# Altium PCB USB2JTAG.PcbDoc
Units mm, origin at the board's own origin, x right, y up, seen from the top; angles counter-clockwise.
Board outline 30 x 14.5 mm, 2 copper layers (Top Layer, Bottom Layer); 28 components, 24 nets, 132 pads, 101 vias.
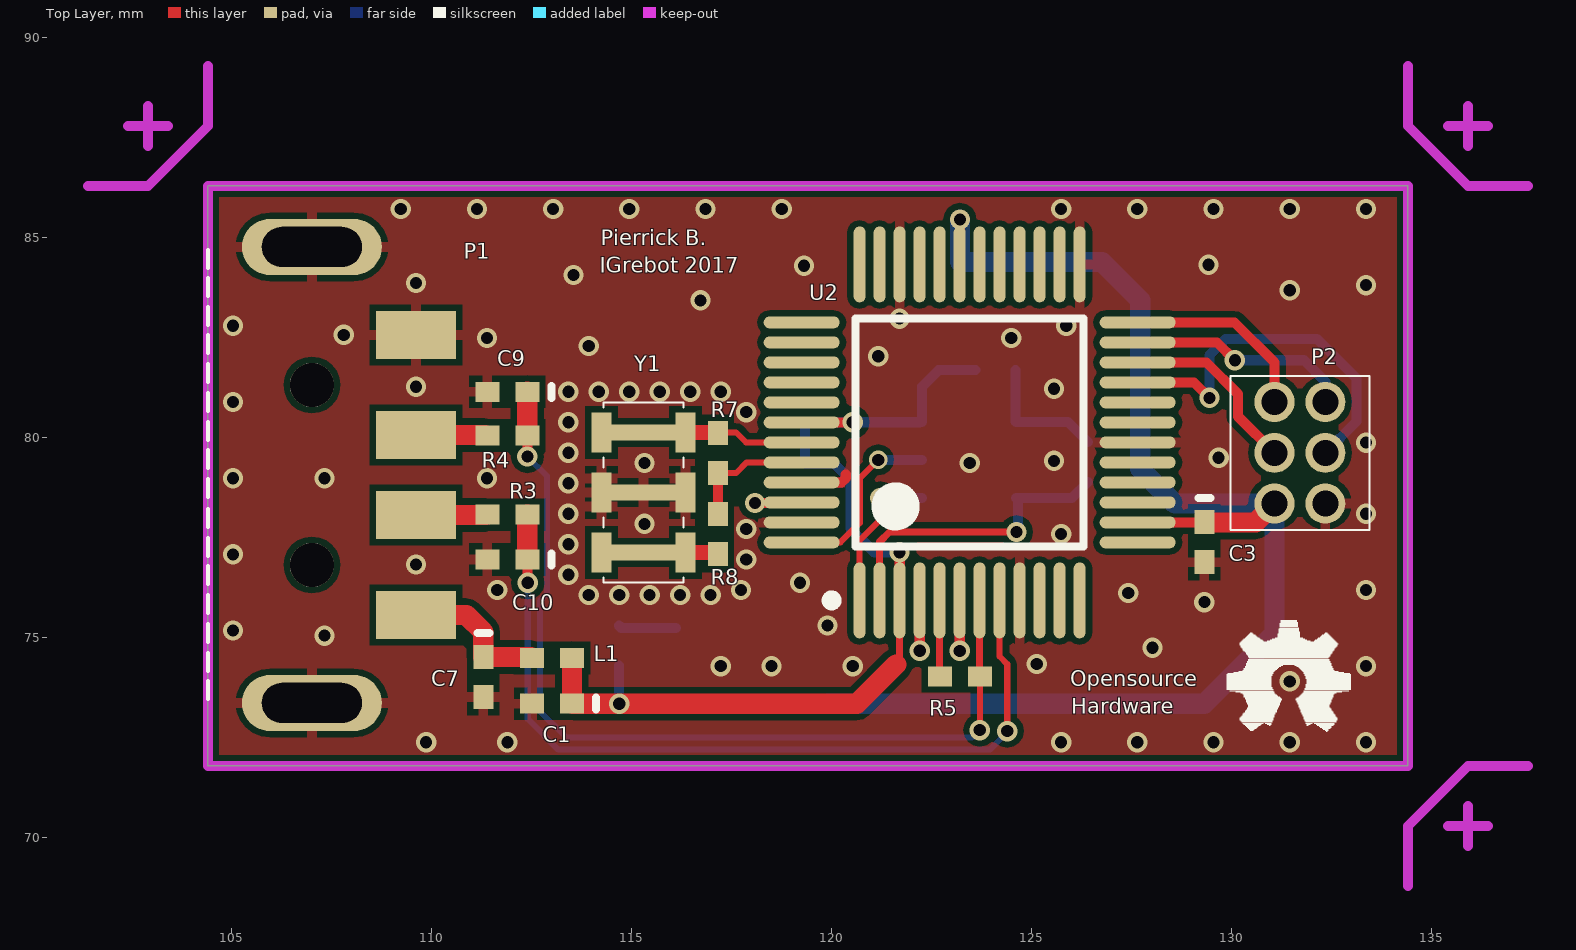
[diagram p0: Top Layer view]
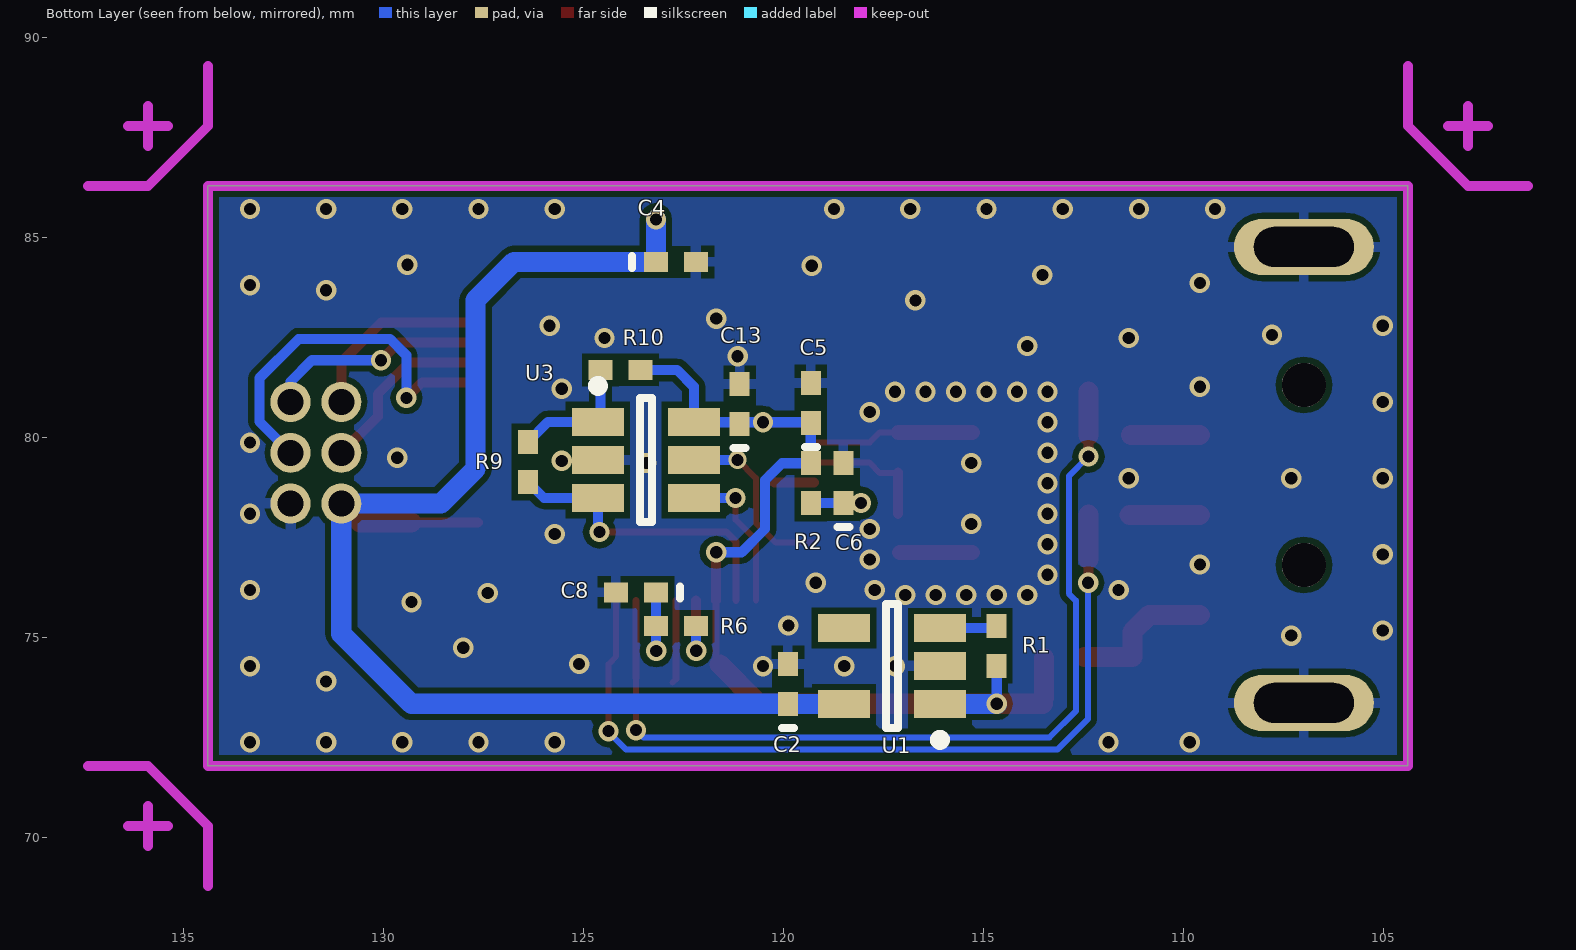
[diagram p1: Bottom Layer view, seen from below]

## Layer stack, top to bottom
Top Layer: signal copper 0.0356
Dielectric: dielectric 0.32, FR-4, Dk 4.8
Bottom Layer: signal copper 0.0356

## Board outline
104.4,71.8 134.4,71.8 134.4,86.3 104.4,86.3

## Design rules (kind name [scope] priority, off if disabled: settings)
Clearance [All] p1: gap=0.152
HoleSize [All] p1: absolutevalues=TRUE maxlimit=2.54 minlimit=0.3 maxpercent=80.000 minpercent=20.000
PlaneClearance [All] p1: clearance=0.305
PlaneConnect PlaneConnect_via [InNet('GND') And IsVia] p1: planeconnectstyle=Direct reliefexpansion=0.508 reliefentries=4 reliefconductorwidth=0.254 reliefairgap=0.254
PlaneConnect [All] p2: planeconnectstyle=Relief reliefexpansion=0.508 reliefentries=4 reliefconductorwidth=0.254 reliefairgap=0.254
PolygonConnect PolygonConnect_via [IsVia vs InNet('GND')] p1: connectstyle=Direct reliefconductorwidth=0.254 reliefentries=4 polygonreliefangle="90 Angle"
PolygonConnect [All] p2: connectstyle=Relief reliefconductorwidth=0.254 reliefentries=4 polygonreliefangle="90 Angle"
RoutingVias [All] p1: holewidth=0.305 width=0.508 viastyle="Through Hole" minholewidth=0.305 minwidth=0.508 maxholewidth=0.711 maxwidth=1.27
SilkscreenOverComponentPads [All] p1: minsilkscreentomaskgap=0.254
SolderMaskExpansion [All] p1: expansion=0.102
Width [All] p1: maxlimit=0.762 minlimit=0.152 preferedwidth=0.254
24 further rules are at their usual default settings.

## Components (designator, comment, footprint, x,y, rotation, side; value= is the part's Value field where it differs from the comment)
C1 "Cap" C0402 113.005,73.355 r180 top
C2 "Cap" C0402 119.9,73.851 r90 bottom
C3 "Cap" C0402 129.311,77.394 r270 top
C4 "Cap" C0402 122.7,84.4 r180 bottom
C5 "Cap" C0402 119.329,80.874 r90 bottom
C6 "Cap" C0402 118.513,78.875 r90 bottom
C7 "Cap" C0402 111.287,74.022 r270 top
C8 "Cap" C0402 123.7,76.141 r0 bottom
C9 "Cap" C0402 111.887,81.153 r180 top
C10 "Cap" C0402 111.887,76.962 r180 top
C13 "Cap" C0402 121.107,80.848 r90 bottom
L1 "ferrite bead" 0402 113,74.5 r0 top
P1 "Usb port" 480371000 109.601,76.073 r270 top
P2 "Header 3X2" minitek127-6way 131.064,80.899 r270 top
R1 "Res2" 0402 114.681,74.803 r270 bottom
R2 "Res2" 0402 119.329,78.867 r270 bottom
R3 "Res2" 0402 111.887,78.08 r0 top
R4 "Res2" 0402 111.887,80.061 r0 top
R5 "Res2" 0402 123.2,74.04 r0 top
R6 "Res2" 0402 122.7,75.292 r180 bottom
R7 "Res2" 0402 117.148,79.629 r90 top
R8 "Res2" 0402 117.148,77.597 r90 top
R9 "Res2" 0402 126.4,79.4 r270 bottom
R10 "Res2" 0402 124.086,81.7 r0 bottom
U1 "MIC5504-3.3YM5" SOT23-5_M 117.3,74.3 r0 bottom
U2 "FT2232D" LQFP-48 123.444,80.137 r90 top
U3 "93AA46BT" SOT23-6_M 123.451,79.449 r180 bottom
Y1 "PBRC6.00MR50X000" PBRC_M 115.289,80.137 r270 top

## Footprints (in the part's own frame and the unit in brackets; to place one, negate y for a bottom-side part, rotate by r counter-clockwise, add the part's x,y. Pads: shape width x height; smd on the part's side, far side on the other; paste and mask are expansions set on the pad)
0402 [mm] "Chip Capacitor, Body 1.0x0.5mm, IPC High Density"
  rect 0.6x0.5 smd: 1(-0.5,0) 2(0.5,0)
  body extent -0.5,-0.25 0.5,0.25, height 0.3
480371000 [mm] "Universal Serial Bus (USB) Shielded I/O Plug, Type A, Right Angle, Surface Mount, 0.76µm Gold (Au) Plating, PCB Thickness 1.20mm-1.60mm, Tray Package, Lead-Free"
  round 1.1 hole 1.1 unplated: 0(-5.25,-2.6) 0(-0.75,-2.6)
  rect 1.2x2 smd: 1(0.5,0) 2(-2,0) 3(-4,0) 4(-6.5,0)
  oval 1.4x3.5 hole 1 slot 2.5 at 90 deg: Harness(-8.7,-2.6) Harness(2.7,-2.6)
  silkscreen extent -8.63,-5.2 2.6,-5.2, body extent -9.35,-20.38 3.35,0.9, height 3.05
C0402 [mm] "Chip Inductor, Body 1.0x0.5mm, IPC High Density"
  rect 0.6x0.5 smd: 1(-0.5,0) 2(0.5,0)
  silkscreen extent -1.1,-0.15 -1.1,0.15, body extent -0.5,-0.3 0.5,0.3, height 0.2
LQFP-48 [mm] "TSQFP, 48-Leads, Body 9,0x9,0mm (max), Pitch 0,50mm, IPC Medium Density"
  oval 1.9x0.3 smd: 1(-4.2,2.75) 2(-4.2,2.25) 3(-4.2,1.75) 4(-4.2,1.25) 5(-4.2,0.75) 6(-4.2,0.25) 7(-4.2,-0.25) 8(-4.2,-0.75) 9(-4.2,-1.25) 10(-4.2,-1.75) 11(-4.2,-2.25) 12(-4.2,-2.75) 25(4.2,-2.75) 26(4.2,-2.25) 27(4.2,-1.75) 28(4.2,-1.25) 29(4.2,-0.75) 30(4.2,-0.25) 31(4.2,0.25) 32(4.2,0.75) 33(4.2,1.25) 34(4.2,1.75) 35(4.2,2.25) 36(4.2,2.75)
  oval 0.3x1.9 smd: 13(-2.75,-4.2) 14(-2.25,-4.2) 15(-1.75,-4.2) 16(-1.25,-4.2) 17(-0.75,-4.2) 18(-0.25,-4.2) 19(0.25,-4.2) 20(0.75,-4.2) 21(1.25,-4.2) 22(1.75,-4.2) 23(2.25,-4.2) 24(2.75,-4.2) 37(2.75,4.2) 38(2.25,4.2) 39(1.75,4.2) 40(1.25,4.2) 41(0.75,4.2) 42(0.25,4.2) 43(-0.25,4.2) 44(-0.75,4.2) 45(-1.25,4.2) 46(-1.75,4.2) 47(-2.25,4.2) 48(-2.75,4.2)
  silkscreen extent -4.32,-2.85 2.85,3.57, body extent -4.5,-4.5 4.5,4.5, height 1.5
minitek127-6way [mm]
  round 1 hole 0.65 paste-0.05 mask+0.05: 1(0,0) 2(0,1.27) 3(1.27,0) 4(1.27,1.27) 5(2.54,0) 6(2.54,1.27)
  silkscreen extent -0.65,-1.1 3.2,2.37, body extent -0.63,-1.05 3.17,2.35, height 5.5
PBRC_M [mm]
  rect 0.3x0.5 smd paste-0.05 mask+0.1: 1(-0.35,1.05) 1(-0.35,-1.05) 1(0.35,1.05) 1(0.35,-1.05) 2(1.15,1.05) 2(1.15,-1.05) 2(1.85,1.05) 2(1.85,-1.05) 3(2.65,1.05) 3(2.65,-1.05) 3(3.35,-1.05) 3(3.35,1.05)
  rect 0.4x2.6 smd: 1(0,0) 2(1.5,0) 3(3,0)
  silkscreen extent -0.75,-1 3.75,1, body extent -0.75,-1 3.75,1, height 1.15
SOT23-5_M [mm] "SOT23, 5-Leads, Body 2.9x1.6mm, Pitch 0.95mm, Lead Span 2.7mm, IPC Low Density"
  rect 1.3x0.7 smd: 1(-1.2,0.95) 2(-1.2,0) 3(-1.2,-0.95) 4(1.2,-0.95) 5(1.2,0.95)
  silkscreen extent -1.32,-1.55 0.15,1.97, body extent -1.25,-1.5 1.25,1.5, height 1.05
SOT23-6_M [mm] "SOT23, 6-Leads, Body 2.9x1.6mm, Pitch 0.95mm, Lead Span 2.7mm, IPC Low Density"
  rect 1.3x0.7 smd: 1(-1.2,0.95) 2(-1.2,0) 3(-1.2,-0.95) 4(1.2,-0.95) 5(1.2,0) 6(1.2,0.95)
  silkscreen extent -1.33,-1.55 0.15,1.97, body extent -1.47,-1.52 1.53,1.48, height 1.3

## Part data
C1 C2 C3 C4 C5 C6 C7 C8 C9 C10 C13: "Capacitor"
P2: "Header, 6-Pin, Dual row"
R1 R2 R3 R4 R5 R6 R7 R8 R9 R10: "Resistor"
Y1: library part PBRC12.00HR50X0RZ

## Via types
v1: diameter 0.508, hole 0.305, Top Layer to Bottom Layer, tented both sides, 98 vias
v2: diameter 0.508, hole 0.305, Top Layer to Bottom Layer, 2 vias
v3: diameter 0.457, hole 0.305, Top Layer to Bottom Layer, tented both sides, 1 vias

## Nets (pads, with @x,y where several pads share a name; then routed paths per layer and width w, separated by ;. In a path a pad name is that pad's centre, name@x,y a point inside that pad or via, vN(x,y) a via of type N, cw(c..) or ccw(c..) an arc to the next point about the centre after c; other vN are vias at no path point)
3V3: C2.1 C3.1 C4.1 P2.5 U1.5 U2.14 U2.31 | length 35.2
  Top Layer w0.254: U2.31 123.2,84.343 v1(123.2,85.461) ; U2.14 129.289,77.887 C3.1@129.311,77.91
  Top Layer w0.508: C3.1@129.311,77.887 130.592,77.887 P2.5
  Bottom Layer w0.254: C2.1@119.85,73.35 C2.1@119.9,73.3 ; C2.1 C2.1@119.904,73.355
  Bottom Layer w0.508: U1.5 C2.1@119.85,73.35 ; C2.1@119.904,73.355 129.311,73.355 131.064,75.108 P2.5 128.575,78.359 127.711,79.223 127.711,83.439 126.75,84.4 C4.1 v1@123.2,85.451
5V_USB: C1.1 C5.1 C13.1 L1.2 R1.2 R2.1 R10.1 U1.1 U2.3 U2.42 U3.6 | length 27.7
  Top Layer w0.178: v1(121.691,77.14) v1@121.694,77.137 ; 121.694,74.425 U2.3
  Top Layer w0.254: U2.42 v2@120.523,80.387 ; 120.625,73.355 121.694,74.425 ; U2.3 v1@121.694,77.137
  Top Layer w0.508: C1.1@113.5,73.5 L1.2 ; C1.1@113.533,73.355 v2(114.681,73.355) 120.625,73.355 121.605,74.336
  Bottom Layer w0.254: v2(114.681,73.355) R1.2 ; C5.1@119.304,80.374 119.321,80.391 v2(120.523,80.391) 122.192,80.391 U3.6@122.2,80.399 ; C5.1 R2.1 120.048,79.367 120.472,78.943 120.472,77.724 121.056,77.14 v1(121.691,77.14) ; U3.6 122.251,81.281 122.67,81.7 R10.1
  Bottom Layer w0.508: v2@114.681,73.35 U1.1
GND: C1.2 C2.2 C3.2 C4.2 C5.2 C6.2 C7.2 C8.2 C9.2 C10.2 C13.2 P1.4 P1.Harness P2.6 U1.2 U2.9 U2.18 U2.25 U2.34 U2.45 U2.47 U3.2 Y1.2 | length 1.2
  Top Layer w0.254: U2.45 120.238,78.887 120.345,78.994 120.345,79.081
  other v1: 109.855,72.39 111.887,72.39 125.73,72.39 127.635,72.39 129.54,72.39 131.445,72.39 133.35,72.39 131.445,73.914 117.221,74.295 118.491,74.295 120.523,74.295 133.35,74.295 125.12,74.346 128.016,74.752 107.315,75.057 105.029,75.184 119.888,75.311 129.311,75.895 113.919,76.073 114.681,76.073 115.443,76.073 116.205,76.073 116.967,76.073 127.406,76.124 111.633,76.2 117.729,76.2 133.35,76.2 119.202,76.378 113.411,76.581 109.601,76.835 117.856,76.962 105.029,77.089 113.411,77.343 125.73,77.597 117.856,77.724 115.316,77.851 113.411,78.105 133.35,78.105 113.411,78.867 105.029,78.994 107.315,78.994 111.379,78.994 115.316,79.375 123.444,79.375 125.552,79.426 129.667,79.502 113.411,79.629 133.35,79.883 113.411,80.391 117.856,80.645 105.029,80.899 113.411,81.153 114.173,81.153 114.935,81.153 115.697,81.153 116.459,81.153 117.221,81.153 125.552,81.229 109.601,81.28 121.158,82.042 113.919,82.296 111.379,82.499 124.485,82.499 107.798,82.575 105.029,82.804 125.857,82.804 121.691,82.982 116.713,83.439 131.445,83.693 133.35,83.82 109.601,83.871 113.538,84.074 119.304,84.303 129.413,84.328 109.22,85.725 111.125,85.725 113.03,85.725 114.935,85.725 116.84,85.725 118.745,85.725 125.73,85.725 127.635,85.725 129.54,85.725 131.445,85.725 133.35,85.725
JTAG_TCK: P2.1 U2.24 | length 4.8
  Top Layer w0.254: U2.24 130.067,82.887 131.064,81.89 P2.1
JTAG_TDI: P2.2 U2.23 | length 5.6
  Top Layer w0.254: U2.23 129.627,82.387 v1(130.073,81.94)
  Bottom Layer w0.254: v1(130.073,81.94) 131.801,81.94 132.334,81.407 P2.2
JTAG_TDO: P2.3 U2.22 | length 4.7
  Top Layer w0.254: U2.22 129.365,81.887 130.15,81.102 130.15,80.543 P2.3
JTAG_TMS: P2.4 U2.21 | length 9.5
  Top Layer w0.254: U2.21 129.052,81.387 v1(129.438,81.001)
  Bottom Layer w0.254: v1(129.438,81.001) 129.438,82.067 129.845,82.474 132.131,82.474 133.113,81.491 133.113,80.408 P2.4
NetC6_1: C6.1 R2.2 U2.46 | length 2.6
  Top Layer w0.254: v1@117.999,78.375 119.232,78.375 U2.46
  Bottom Layer w0.254: v1@117.983,78.359 117.999,78.375 R2.2@119.3,78.375
  other v1: 118.075,78.375
NetC7_1: C7.1 L1.1 P1.1 | length 3.7
  Top Layer w0.254: L1.1@112.478,74.522 L1.1
  Top Layer w0.508: P1.1 110.863,75.573 111.287,75.149 C7.1 L1.1@112.478,74.522
NetC8_1: C8.1 R6.1 U2.6 | length 2.8
  Top Layer w0.254: v1@123.194,74.578 v1(123.194,74.676) U2.6
  Bottom Layer w0.254: v1(123.194,74.676) 123.194,76.135 C8.1
NetC9_1: C9.1 R4.2 R5.2 U2.7 | length 23.1
  Top Layer w0.152: R5.2@123.694,73.99 123.698,73.986 v1(123.698,72.695)
  Top Layer w0.178: R5.2@123.694,73.99 U2.7
  Top Layer w0.254: R4.2 v1(112.387,79.535) v1@112.395,79.527
  Top Layer w0.508: R4.2 C9.1
  Bottom Layer w0.152: v1(112.387,79.535) 112.878,79.045 112.878,76.106 112.7,75.928 112.7,73.172 113.361,72.511 123.514,72.511 v1(123.698,72.695) ; v1@123.546,72.669 v1@123.698,72.822
NetC10_1: C10.1 R3.2 U2.8 | length 21
  Top Layer w0.152: U2.8 124.194,74.536 124.384,74.346 v1(124.384,72.669)
  Top Layer w0.254: v1@112.387,76.378 C10.1
  Top Layer w0.508: C10.1 R3.2
  Bottom Layer w0.152: v1(112.395,76.378) 112.395,72.974 113.163,72.206 123.946,72.206 v1@124.409,72.669
NetP1_2: P1.2 R3.1 | length 1.8
  Top Layer w0.254: R3.1@111.355,78.073 R3.1@111.387,78.105
  Top Layer w0.508: P1.2 R3.1@111.355,78.073
NetP1_3: P1.3 R4.1 | length 1.8
  Top Layer w0.254: R4.1@111.324,80.073 R4.1@111.387,80.01
  Top Layer w0.508: P1.3 R4.1@111.324,80.073
NetR1_1: R1.1 U1.3 | length 1.4
  Bottom Layer w0.254: R1.1 114.734,75.25 U1.3
NetR5_1: R5.1 U2.5 | length 2.1
  Top Layer w0.152: R5.1@122.694,73.978 R5.1@122.784,73.889
  Top Layer w0.178: R5.1@122.694,73.978 U2.5
NetR6_2: R6.2 U2.4 | length 1.9
  Top Layer w0.254: U2.4 v1(122.194,74.681) v1@122.199,74.676
  Bottom Layer w0.254: v1(122.194,74.681) 122.194,75.286 R6.2
NetR7_1: R7.1 R8.2 U2.44 | length 3.2
  Top Layer w0.152: R7.1@117.156,79.121 117.602,79.121 117.868,79.387 U2.44
  Top Layer w0.254: R8.2 R7.1 R7.1@117.156,79.121
NetR7_2: R7.2 U2.43 Y1.1 | length 4.1
  Top Layer w0.152: R7.2@117.156,80.137 117.602,80.137 117.852,79.887 U2.43
  Top Layer w0.254: R7.2@117.14,80.137 R7.2 R7.2@117.156,80.137
  Top Layer w0.381: Y1.1@115.289,80.137 R7.2@117.14,80.137
NetR8_1: R8.1 Y1.3 | length 1.9
  Top Layer w0.254: R8.1@117.108,77.137 R8.1
  Top Layer w0.381: Y1.3@115.289,77.137 R8.1@117.108,77.137
NetR9_1: R9.1 R10.2 U3.1 | length 3.3
  Bottom Layer w0.254: R10.2 124.586,80.413 124.6,80.399 125.901,80.399 R9.1
NetR9_2: R9.2 U2.2 U3.3 | length 7.8
  Top Layer w0.178: U2.2 121.194,77.404 121.437,77.648 v1(124.612,77.648)
  Bottom Layer w0.254: U3.3@124.6,78.499 U3.3 ; v1(124.612,77.648) 124.651,77.686 U3.3 ; R9.2 125.999,78.499 U3.3
NetU2_1: U2.1 U3.4 | length 3.9
  Top Layer w0.152: U2.1 120.694,77.438 121.209,77.953 v1@121.209,78.511
  Bottom Layer w0.254: v1@121.171,78.499 U3.4
  other v1: 121.209,78.499
NetU2_48: U2.48 U3.5 | length 4.5
  Top Layer w0.152: U2.48 120.211,77.387 120.701,77.876 120.701,78.994 v3(121.158,79.451)
  Bottom Layer w0.254: v3@121.158,79.449 U3.5
pads on no net: P1.0 U1.4 U2.10 U2.11 U2.12 U2.13 U2.15 U2.16 U2.17 U2.19 U2.20 U2.26 U2.27 U2.28 U2.29 U2.30 U2.32 U2.33 U2.35 U2.36 U2.37 U2.38 U2.39 U2.40 U2.41

## Polygon pours and split planes (outlines as drawn)
GND on Bottom Layer "BOT_GND" (solid, remove dead copper, pour order 2): 104.4,86.3 134.4,86.3 134.4,71.8 104.4,71.8
GND on Top Layer "TOP_GND" (solid, remove dead copper, pour order 4): 104.4,86.3 134.4,86.3 134.4,71.8 104.4,71.8

## Keep-outs
Keep-Out Layer:
  lines w0.254: 101.4,86.3 102.9,86.3 104.4,87.8 104.4,89.3 ; 102.4,87.8 103.4,87.8 ; 102.9,87.3 102.9,88.3 ; 134.4,68.8 134.4,70.3 135.9,71.8 137.4,71.8 ; 134.4,89.3 134.4,87.8 135.9,86.3 137.4,86.3 ; 135.4,70.3 136.4,70.3 ; 135.4,87.8 136.4,87.8 ; 135.9,69.8 135.9,70.8 ; 135.9,87.3 135.9,88.3 ; 104.4,71.8 104.4,86.3 134.4,86.3 134.4,71.8 104.4,71.8

## Other copper
Top Layer:
  pour cut-out: 116.586,79.502 117.551,79.502 117.55,76.645 116.586,76.657

## Silkscreen, mask and mechanical layers (free items; w line width, h text height)
Top Overlay:
  drawing of 199 lines, arcs and shapes, not listed
  text "Pierrick B." at 114.224,84.811 h0.38
  text "IGrebot 2017" at 114.198,84.125 h0.38
  text "Opensource" at 125.959,73.787 h0.38
  text "Hardware" at 125.984,73.101 h0.38

## Dimensions
134.4,86.3 to 104.4,86.3 on Drill Drawing
134.4,86.3 to 134.4,71.8 on Drill Drawing